# Altium PCB PCB1.PcbDoc
Units mil, origin at the board's own origin, x right, y up, seen from the top; angles counter-clockwise.
Board outline 985 x 1810 mil, 2 copper layers (Top Layer, Bottom Layer); 11 components, 11 nets, 28 pads, 0 vias.
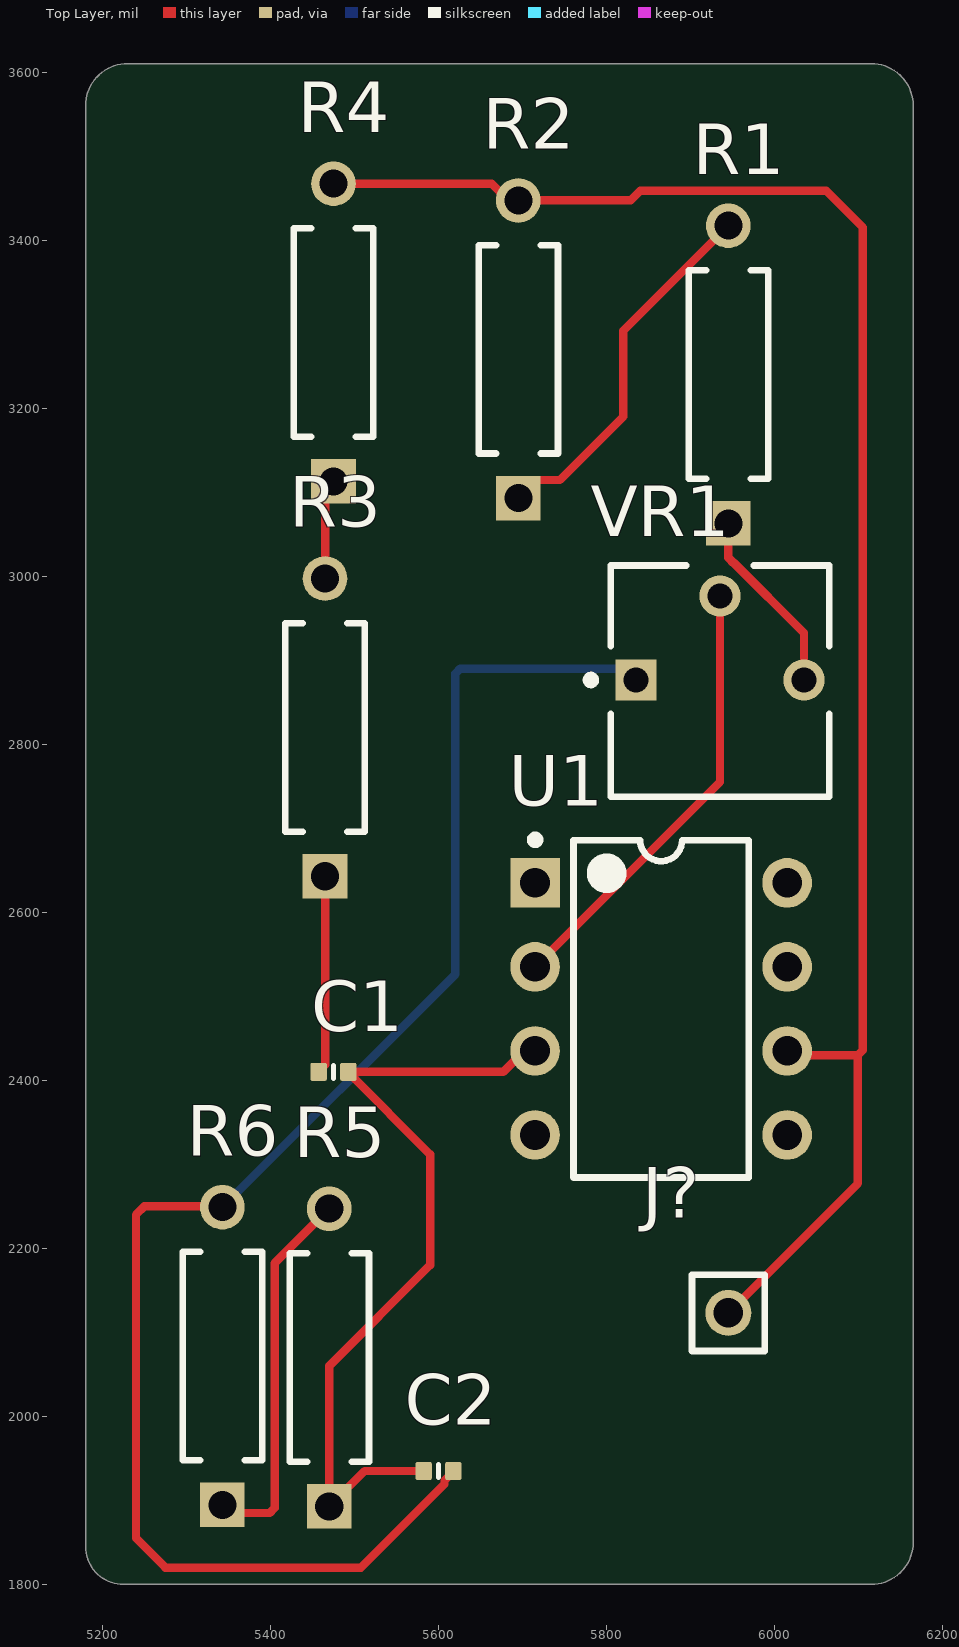
[diagram p0: Top Layer view]
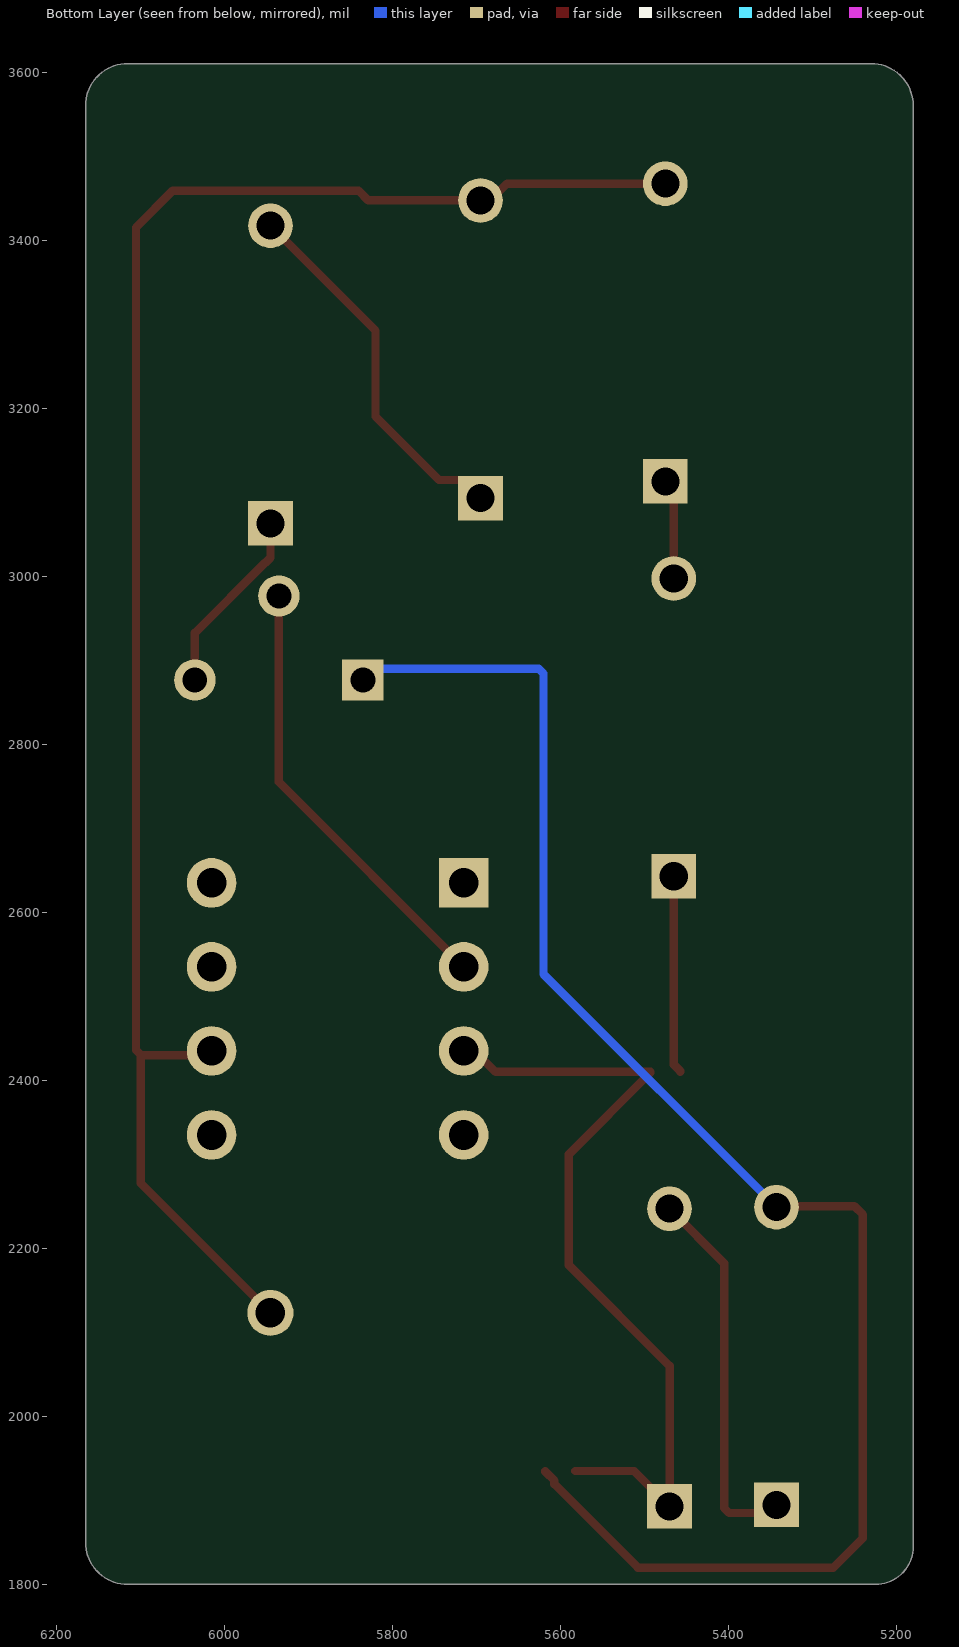
[diagram p1: Bottom Layer view, seen from below]

## Layer stack, top to bottom
Top Solder: solder mask 0.4, Solder Resist, Dk 3.5
Top Layer: signal copper 1.4
Dielectric 1: dielectric 12.6, FR-4, Dk 4.8
Bottom Layer: signal copper 1.4
Bottom Solder: solder mask 0.4, Solder Resist, Dk 3.5

## Board outline
5180,1845 ccw(c5225,1845) 5225,1800 6115,1800 ccw(c6115,1850) 6165,1850 6165,3560 ccw(c6115,3560) 6115,3610 5230,3610 ccw(c5230,3560) 5180,3560

## Design rules (kind name [scope] priority, off if disabled: settings)
Clearance [All] p1: gap=10 ignorepadtopadclearanceinfootprint=FALSE
PolygonConnect [All] p1: connectstyle=Relief reliefconductorwidth=10 reliefentries=4 polygonreliefangle="90 Angle" airgapwidth=10
RoutingVias [All] p1: holewidth=28 width=50 viastyle="Through Hole" minholewidth=28 minwidth=50 maxholewidth=28 maxwidth=50
SolderMaskExpansion [All] p1: expansion=4 istentingtop=FALSE
SupplyNets "Schematic Supply Nets" [InNet('GND')] p1: voltage=0.000
Width [All] p1: maxlimit=10 minlimit=10 preferedwidth=10
30 further rules are at their usual default settings.

## Components (designator, comment, footprint, x,y, rotation, side; value= is the part's Value field where it differs from the comment)
C1 "Capacitor 1nF +/-20% 50V 0402" CAPC0402(1005)33_L 5475,2410 r0 top value=1nF
C2 "Capacitor 1nF +/-20% 50V 0402" CAPC0402(1005)33_L 5600,1935 r0 top value=1nF
J? "TMM-101-01-T-S" FP-TMM-101-01-T-S-MFG 5945,2123.07 r0 top
R1 "MFR-25FBF52-10K" RESA60-630X240 5945,3240 r90 top value=10k
R2 "MFR-25FBF52-10K" RESA60-630X240 5695,3270 r90 top value=10k
R3 "MFR-25FBF52-10K" RESA60-630X240 5465,2820 r90 top value=10k
R4 "MFR-25FBF52-10K" RESA60-630X240 5475,3290 r90 top value=10k
R5 "MFR-25FBF52-10K" RESA60-630X240 5470,2070 r90 top value=10k
R6 "MFR-25FBF52-10K" RESA60-630X240 5342.79,2071.81 r90 top value=10k
U1 "LM741CN/NOPB" P0008A 5865,2485 r0 top
VR1 "3362P-1-103LF" BOUR-3362P 5935,2875 r0 top

## Footprints (in the part's own frame and the unit in brackets; to place one, negate y for a bottom-side part, rotate by r counter-clockwise, add the part's x,y. Pads: shape width x height; smd on the part's side, far side on the other; paste and mask are expansions set on the pad)
BOUR-3362P [mm] "THD, 3-Leads, Body 6.6x6.99mm, Pitch 2.54mm"
  rect 1.25x1.25 hole 0.75: 1(-2.54,0.035)
  round 1.25 hole 0.75: 2(0,2.575) 3(2.54,0.035)
  silkscreen extent -4.02,-3.49 3.3,3.5, body extent -3.3,-3.49 3.3,3.5, height 4.5
CAPC0402(1005)33_L [mm] "Chip Capacitor, Body 1.0x0.5mm, Height 0.33mm, IPC High Density"
  rrect25% 0.5x0.55 smd: 1(-0.45,0) 2(0.45,0)
  silkscreen extent 0,-0.2 0,0.2, body extent -0.5,-0.25 0.5,0.25, height 0.55
FP-TMM-101-01-T-S-MFG [mm]
  round 1.39 hole 0.89 paste-2539.97 mask+0: 1(0,0)
  silkscreen extent -1.1,-1.15 1.1,1.15, body extent -1.1,-1.15 1.1,1.15, height 0.25
P0008A [mm] "DIP, 8-Leads, Body 10.15x6.6mm, Pitch 2.54mm"
  rect 1.5x1.5 hole 0.9: 1(-3.81,3.81)
  round 1.5 hole 0.9: 2(-3.81,1.27) 3(-3.81,-1.27) 4(-3.81,-3.81) 5(3.81,-3.81) 6(3.81,-1.27) 7(3.81,1.27) 8(3.81,3.81)
  silkscreen extent -3.93,-5.1 2.65,5.23, body extent -3.95,-5.07 3.95,5.07, height 5.08
RESA60-630X240 [mm] "Axial Resistor, 2-Leads, Dia 2.4mm, Body Length 6.3mm"
  rect 1.35x1.35 hole 0.85: 1(-4.5,0)
  round 1.35 hole 0.85: 2(4.5,0)
  silkscreen extent -3.15,-1.2 3.15,1.2, body extent -4.77,-1.19 4.77,1.2, height 2.4

## Part data
C1 C2: library part CMP-001-00066-3, "Chip Capacitor, 1nF +/-20%, 50V, 0402, Thickness 0.33 mm", Case/Package=0402, Max Operating Temperature=85°C, Min Operating Temperature=-55°C, Tolerance=10%, Voltage Rating=50V, Mounting Technology=SMT, Pins=2
J?: library part CMP-02766-001504-1, "CONN HEADER VERT 1POS", Insulation Color=Black, Max Operating Temperature=105°C, Min Operating Temperature=-55°C, Connector Type=Header, Contact Finish - Mating=TIN, Contact Material=Bronze, Contact Plating=Tin, Contact Shape=Square, Contact Type="Male Pin", Fastening Type=Pull, Gender=Male, Insulation Material=Polymer, Lead Free="Lead Free", Mount="Through Hole", Number of Contacts=1, Number of Positions=1, Number of Rows=1, Packaging=Bulk, Radiation Hardening=No, REACH SVHC="No SVHC", Series=TMM, Termination=Solder
R1 R2 R3 R4 R5 R6: library part CMP-009-00047-4, "Axial Resistor, 10 KOhm, +/- 1%, 0.25 W, -55 to 155 degC, 2-Pin THD, RoHS, Bulk", Case/Package=Axial, Manufacturer=Yageo, Max Operating Temperature=155°C, Min Operating Temperature=-55°C, Package Description="2-Pin Axial Lead, Dia 2.4 mm, Body Length 6.3 mm", Package Quantity=200, Package Reference=MFR-25, Power=250mW, Tolerance=1%, Voltage Rating=250V, Datasheet URL=http://www.yageo.com/documents/recent/Yageo%20LR_MFR_2013.pdf, Datasheet Version=Apr-13, Manufacturer URL=http://www.yageo.com/, Mounting Technology=TH, Packaging=Bulk, RoHS Compliant=True
U1: library part CMP-0055-00162-3, "Operational Amplifier, 8-pin MDIP, Pb-Free", Manufacturer="Texas Instruments", Package Reference=P0008A, PackageTopMarking=NSUZXYTTE#*LM*741CN, PowerWise=N, Code_JEDEC=MS-001-BA, ComponentLink1Description="Datasheet URL", ComponentLink1URL=http://www.ti.com/general/docs/lit/getliterature.tsp?genericPartNumber=LM741&fileType=pdf, CompType=Amplifiers, PackageDescription="MDIP, .365 x .250 x .130in, 8 Lead, .100in Pitch", PinCount=8, RoHS=Y
VR1: library part CMP-009-00039-2, "Square Trimpot(R) Trimming Potentiometer, 10 KOhm, 300 V, -55 to 125 degC, 3-Pin THD, RoHS, Tube", Case/Package=3326P, Manufacturer=Bourns, Max Operating Temperature=125°C, Min Operating Temperature=-55°C, Package Description="3-Pin Through Hole Device, Body 6.6 x 6.99 mm, Pitch 2.54 mm", Package Quantity=250, Power=500mW, Resistance=10k, Tolerance=10%, Voltage Rating=300V, Composition=Potentiometer, Datasheet URL=http://www.bourns.com/docs/Product-Datasheets/3362.pdf, Datasheet Version=May-16, Lead Pitch=2.54mm, Manufacturer URL=http://www.bourns.com/, Mounting Technology=TH, Package Reference=3326P, Packaging=Rail/Tube, Pins=3, RoHS Compliant=True

## Nets (pads, with @x,y where several pads share a name; then routed paths per layer and width w, separated by ;. In a path a pad name is that pad's centre, name@x,y a point inside that pad or via, vN(x,y) a via of type N, cw(c..) or ccw(c..) an arc to the next point about the centre after c; other vN are vias at no path point)
+V: U1.7
-V: U1.4
GND: C2.2 R6.2 VR1.1 | length 1908.2
  Top Layer w10: R6.2 5341.76,2250 5250,2250 5240,2240 5240,1855 5275,1820 5507.72,1820 5607.13,1919.4 5607.13,1923.43 5617.72,1934.02 C2.2
  Bottom Layer w10: R6.2 5620,2526.19 5620,2884.14 5625.86,2890 5821.38,2890 VR1.1
NetC1_1: C1.1 R3.1 | length 236
  Top Layer w10: C1.1 5457.28,2410.98 5465,2418.7 R3.1
NetC1_2: C1.2 C2.1 R5.1 U1.3 | length 969.6
  Top Layer w10: C2.1 5512.17,1935 R5.1 5470,2060 5590,2180 5590,2311.73 5492.72,2409.02 C1.2 5677.03,2410 5702.03,2435 U1.3
NetJ?_1: J?.1 R2.2 R4.2 U1.6 | length 2105.6
  Top Layer w10: R4.2 5663.32,3467.17 5683.32,3447.17 R2.2 5828.66,3447.17 5840.24,3458.74 6061.26,3458.74 6105,3415 6105,2435.86 6099.14,2430 ; J?.1 6099.14,2277.21 6099.14,2430 ; U1.6 6020,2430 6099.14,2430
NetR1_1: R1.1 VR1.3 | length 224.1
  Top Layer w10: R1.1 5945,3021.84 5950.86,3015.98 5951.41,3015.98 6035,2932.39 VR1.3
NetR1_2: R1.2 R2.1 | length 444.2
  Top Layer w10: R2.1 5716.57,3114.41 5744.41,3114.41 5820,3190 5820,3292.17 R1.2
NetR3_2: R3.2 R4.1 | length 119.8
  Top Layer w10: R3.2 5465,3102.83 R4.1
NetR5_2: R5.2 R6.1 | length 451.9
  Top Layer w10: R6.1 5352.43,1885 5399.14,1885 5405,1890.86 5405,2182.17 R5.2
NetU1_2: U1.2 VR1.2 | length 532.5
  Top Layer w10: U1.2 5935,2755 VR1.2
pads on no net: U1.1 U1.5 U1.8

## Silkscreen, mask and mechanical layers (free items; w line width, h text height)
Mechanical 1:
  the board outline again, w10